# Altium PCB Yamper.PcbDoc
Units mm, origin at the board's own origin, x right, y up, seen from the top; angles counter-clockwise.
Board outline 35.96 x 25.42 mm, 2 copper layers (Top Layer, Bottom Layer); 27 components, 19 nets, 101 pads, 29 vias.
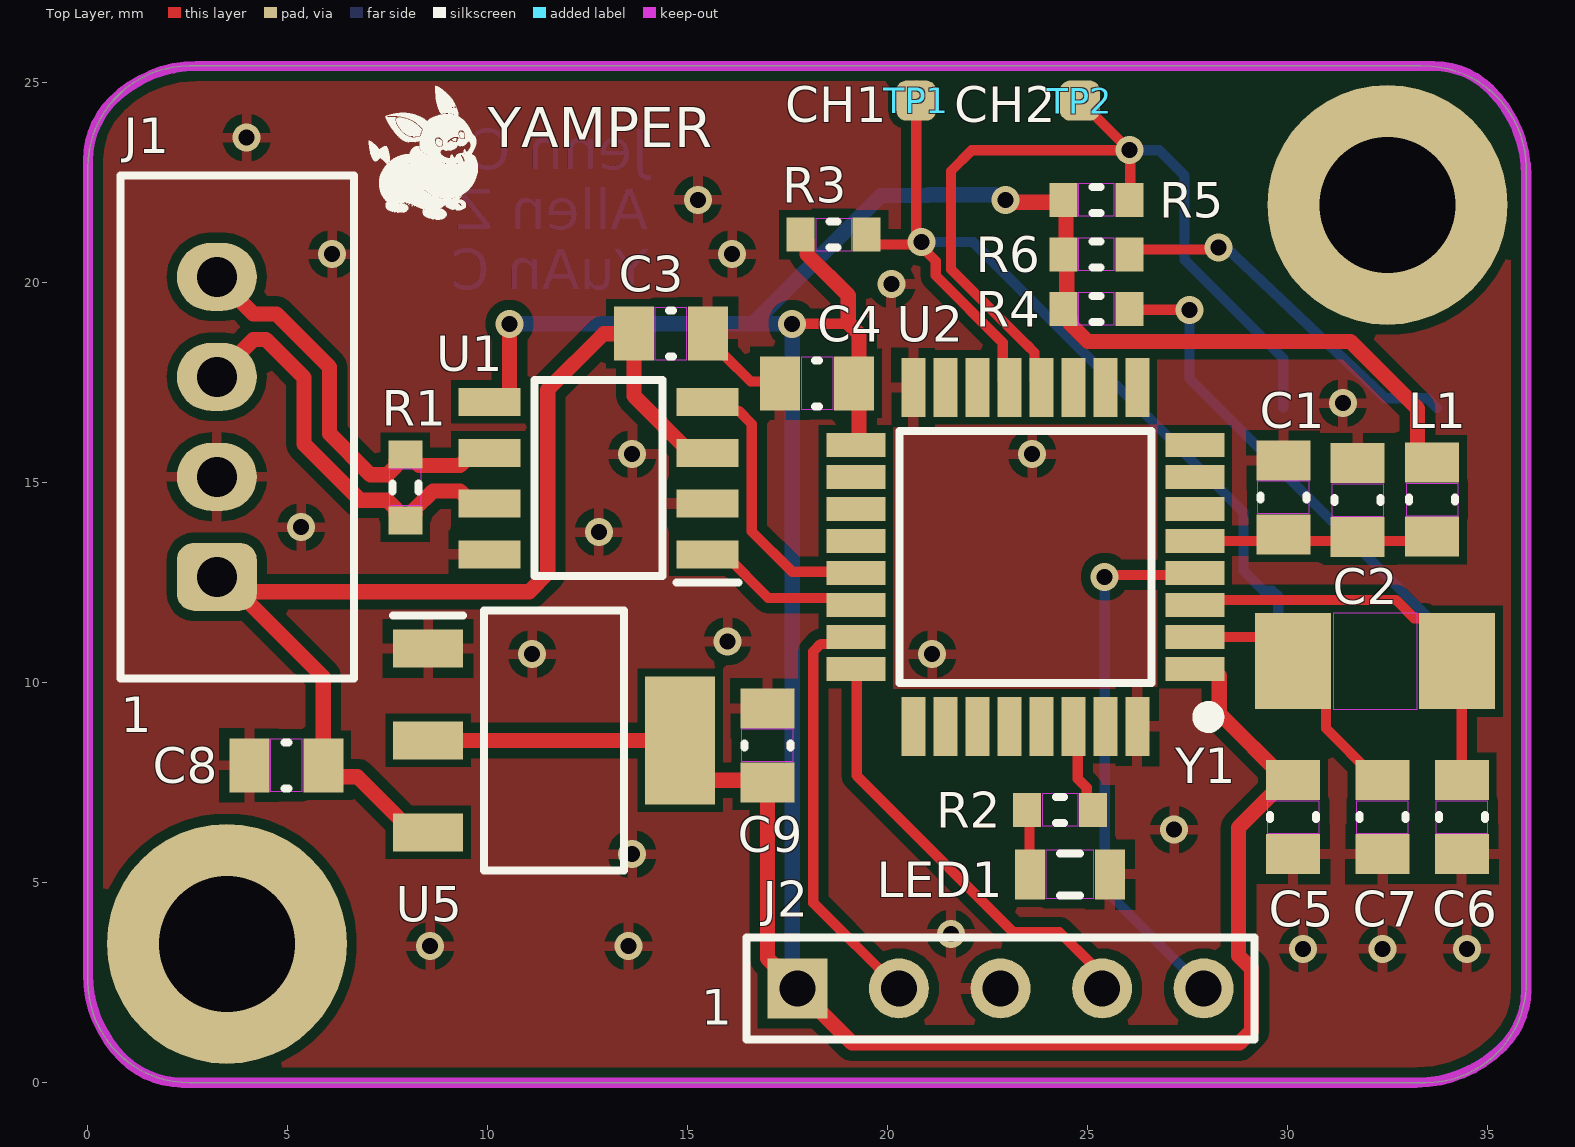
[diagram p0: Top Layer view]
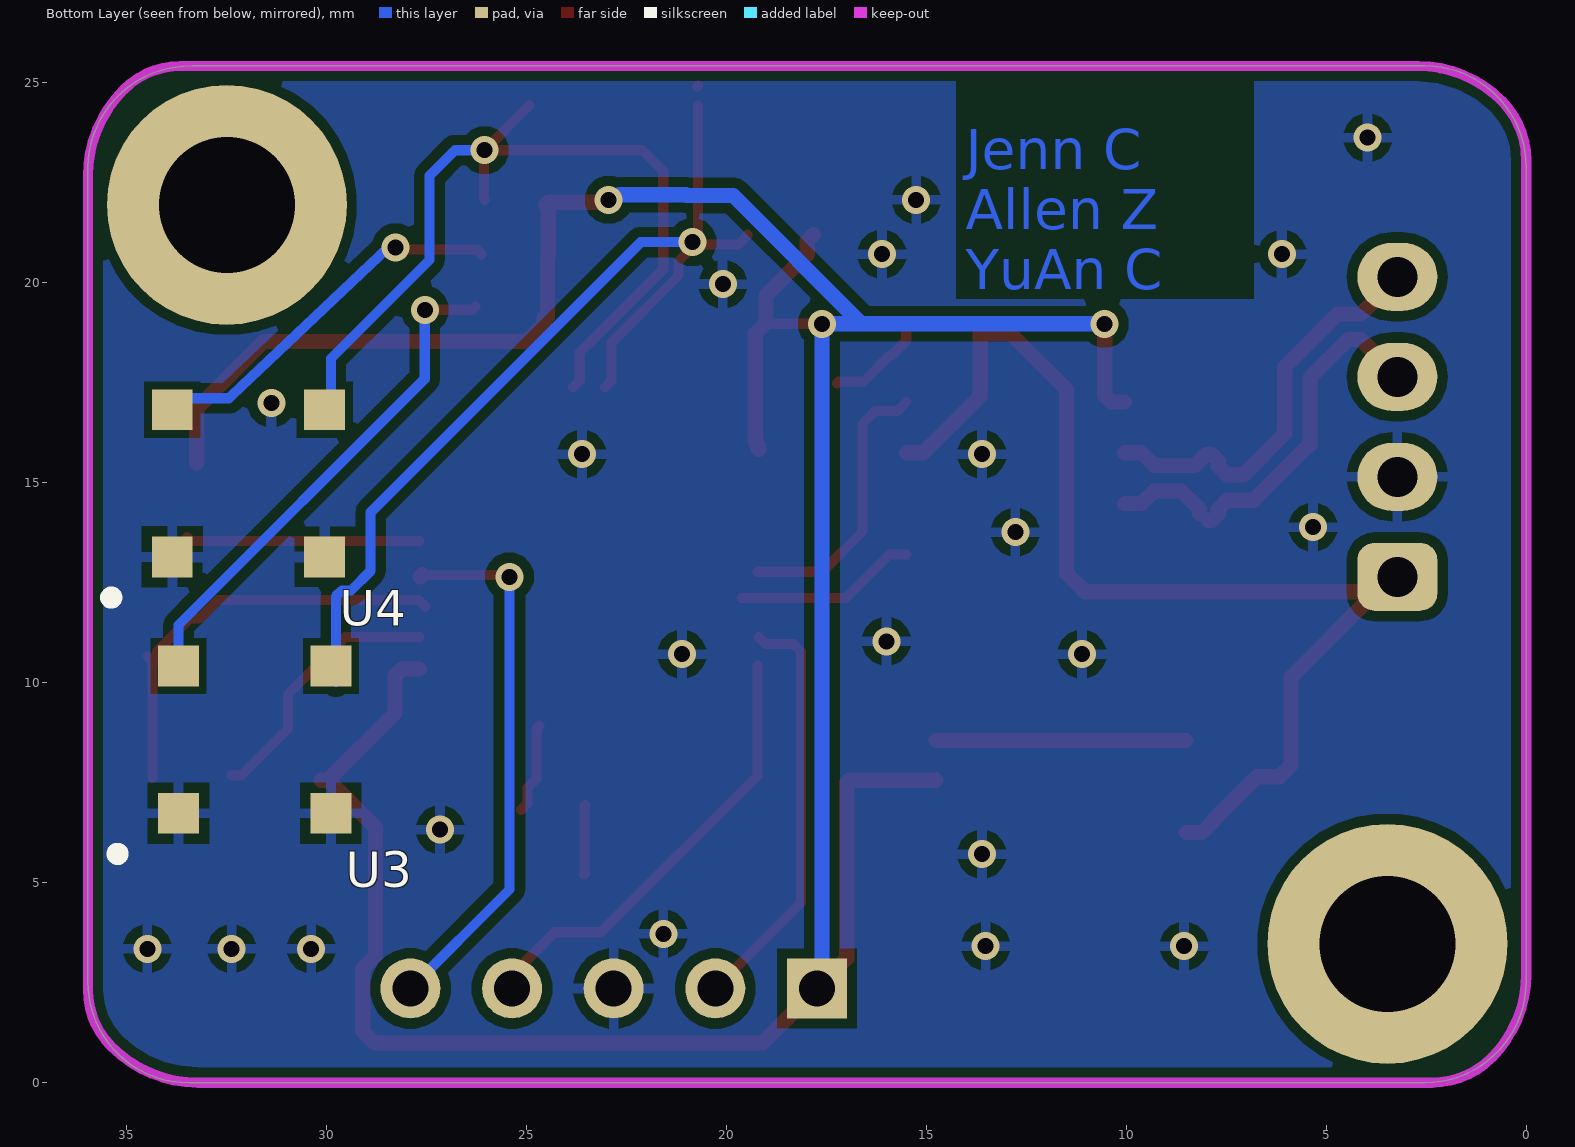
[diagram p1: Bottom Layer view, seen from below]
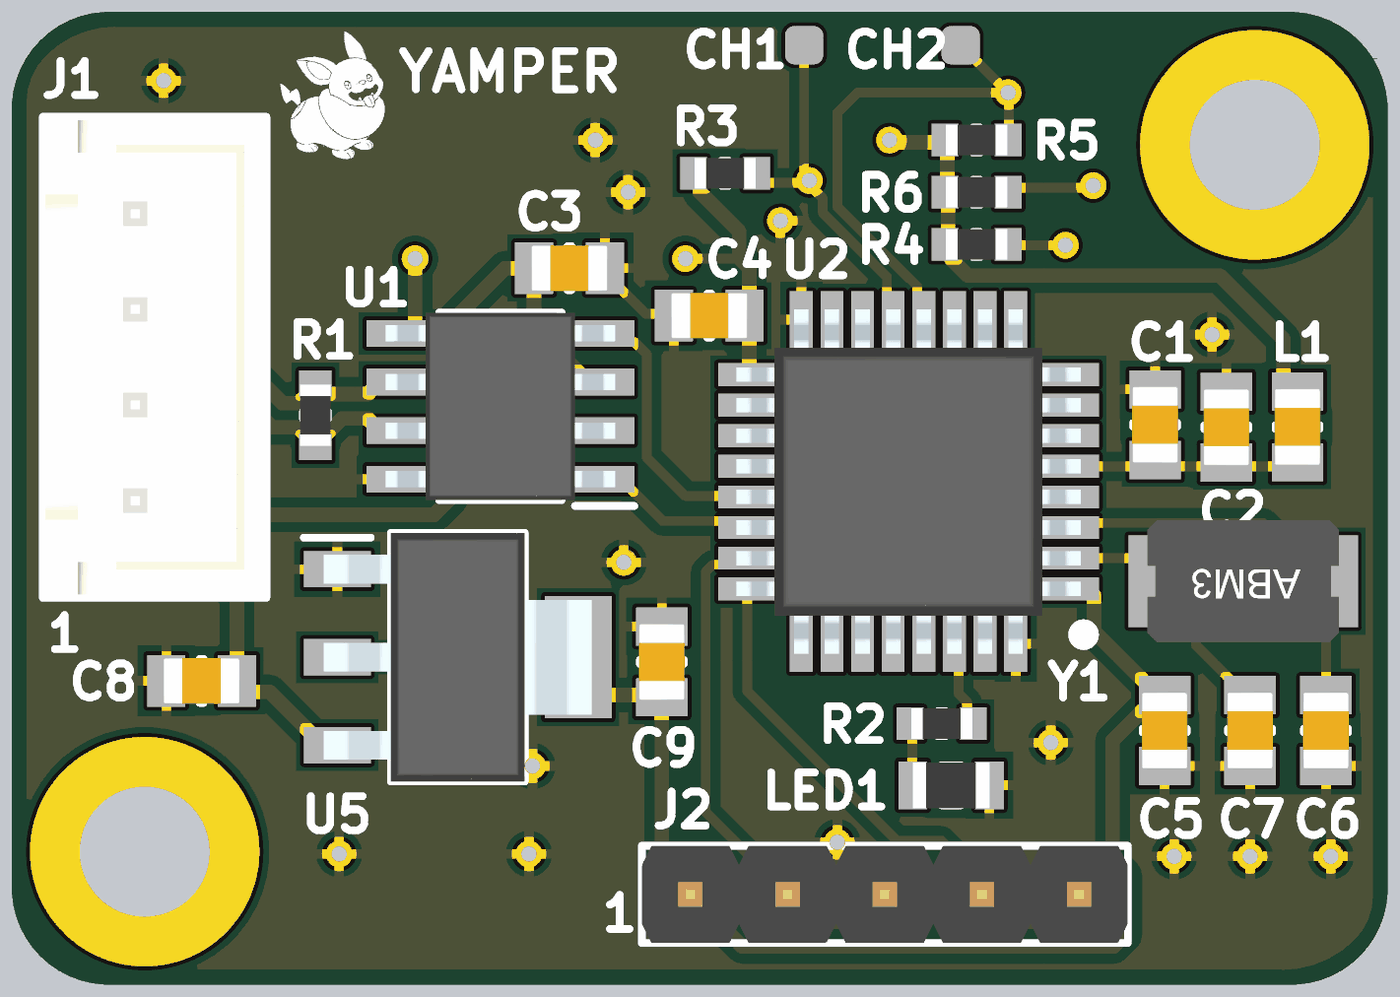
[diagram p2: 3D render of the assembled board from above, using the file's embedded part models]

## Layer stack, top to bottom
Top Solder: solder mask 0.0102, Solder Resist, Dk 3.5
Top Layer: signal copper 0.0356
Dielectric 1: dielectric 0.32, FR-4, Dk 4.8
Bottom Layer: signal copper 0.0356
Bottom Solder: solder mask 0.0102, Solder Resist, Dk 3.5

## Board outline
2.54,0 cw(c2.54,2.54) 0,2.54 0,22.88 cw(c2.54,22.88) 2.54,25.42 33.356,25.42 cw(c33.391,22.851) 35.96,22.88 35.96,2.54 cw(c33.449,2.512) 33.449,0

## Design rules (kind name [scope] priority, off if disabled: settings)
Clearance [All] p1: gap=0.254 ignorepadtopadclearanceinfootprint=FALSE except(0: Arc-Hole Track-Hole SMDPad-Hole THPad-Hole Via-Hole Fill-Hole Poly-Hole Region-Hole Text-Hole; 0.127: Arc-Arc Arc-Track Track-Track SMDPad-SMDPad; 0.2: Arc-SMDPad Track-SMDPad SMDPad-Fill SMDPad-Poly SMDPad-Region)
DiffPairsRouting [All] p1: maxlimit=0.254 minlimit=0.254 mostfreqgap=0.254 substack1={6880419E-5F7E-40DC-B808-49A93CB59D2A} toplayer_{6880419e-5f7e-40dc-b808-49a93cb59d2a}_minwidth=0.381 toplayer_{6880419e-5f7e-40dc-b808-49a93cb59d2a}_maxwidth=0.381 toplayer_{6880419e-5f7e-40dc-b808-49a93cb59d2a}_prefwidth=0.381 bottomlayer_{6880419e-5f7e-40dc-b808-49a93cb59d2a}_minwidth=0.381 bottomlayer_{6880419e-5f7e-40dc-b808-49a93cb59d2a}_maxwidth=0.381 bottomlayer_{6880419e-5f7e-40dc-b808-49a93cb59d2a}_prefwidth=0.381 toplayer_minwidth=0.381 toplayer_maxwidth=0.381 toplayer_prefwidth=0.381 bottomlayer_minwidth=0.381 bottomlayer_maxwidth=0.381 bottomlayer_prefwidth=0.381 maxuncoupledlength=12.7
PolygonConnect [All] p1: connectstyle=Relief reliefconductorwidth=0.254 reliefentries=4 polygonreliefangle="90 Angle" airgapwidth=0.254
RoutingVias [All] p1: holewidth=0.5 width=1 viastyle="Through Hole" minholewidth=0.2 minwidth=0.6 maxholewidth=0.711 maxwidth=1.27
SilkToSolderMaskClearance [IsPad] p1: minsilkscreentomaskgap=0.15 clearancetoexposedcopper=TRUE
SolderMaskExpansion [All] p1: expansion=0.102 istentingtop=FALSE
Width [All] p1: maxlimit=10 minlimit=0.254 preferedwidth=0.254 substack1={6880419E-5F7E-40DC-B808-49A93CB59D2A} toplayer_{6880419e-5f7e-40dc-b808-49a93cb59d2a}_maxwidth=0.381 toplayer_{6880419e-5f7e-40dc-b808-49a93cb59d2a}_prefwidth=0.381 bottomlayer_{6880419e-5f7e-40dc-b808-49a93cb59d2a}_maxwidth=0.381 bottomlayer_{6880419e-5f7e-40dc-b808-49a93cb59d2a}_prefwidth=0.381 minimp=50.000000 maximp=50.000000 favimp=50.000000
28 further rules are at their usual default settings.

## Classes and differential pairs
differential pair CAN: +CAN_P -CAN_N

## Components (designator, comment, footprint, x,y, rotation, side; value= is the part's Value field where it differs from the comment)
C1 "Capacitor - Nonpolarized" "0805 - Capacitor" 29.884,14.632 r90 top value=10nF
C2 "Capacitor - Nonpolarized" "0805 - Capacitor" 31.744,14.565 r90 top value=1uF
C3 "Capacitor - Nonpolarized" "0805 - Capacitor" 14.575,18.724 r180 top value=100nF
C4 "Capacitor - Nonpolarized" "0805 - Capacitor" 18.228,17.484 r180 top value=100nF
C5 "Capacitor - Nonpolarized" "0805 - Capacitor" 30.132,6.639 r90 top value=100nF
C6 "Capacitor - Nonpolarized" "0805 - Capacitor" 34.348,6.639 r90 top value=27pF
C7 "Capacitor - Nonpolarized" "0805 - Capacitor" 32.364,6.639 r90 top value=27pF
C8 "Capacitor - Nonpolarized" "0805 - Capacitor" 4.96,7.936 r180 top value=10uF
C9 "Capacitor - Nonpolarized" "0805 - Capacitor" 16.988,8.432 r270 top value=10uF
J1 "JST4PINXH" B4B-XH 3.224,12.648 r90 top
J2 "1x5 Header" HDR1X5 17.736,2.356 r0 top
L1 "Inductor" "0805 - Capacitor" 33.604,14.575 r90 top
LED1 "RED DEBUG LED" "0805 - Resistor" 24.552,5.208 r0 top
R1 "Resistor" "0603 - Resistor" 7.936,14.88 r270 top value=120
R2 "Resistor" "0603 - Resistor" 24.304,6.82 r180 top value=120
R3 "Resistor" "0603 - Resistor" 18.643,21.204 r180 top value=10k
R4 "Resistor" "0603 - Resistor" 25.215,19.344 r0 top value=80
R5 "Resistor" "0603 - Resistor" 25.215,22.072 r180 top value=10k
R6 "Resistor" "0603 - Resistor" 25.215,20.708 r0 top value=80
TP1 "Test Point" "Test Point" 20.708,24.552 r90 top
TP2 "Test Point" "Test Point" 24.8,24.552 r90 top
U1 "TJA1051T_3,118" TJA1051T/3,118 12.769,15.113 r180 top
U2 "STM32F042K4T6" QFP80P900X900X160-32N 23.436,13.144 r180 top
U3 "OPB733TR" OPB733TR 33.694,6.736 r180 bottom
U4 "OPB733TR" OPB733TR 33.852,13.144 r180 bottom
U5 "TLV1117-33IDCYR" TLV1117 11.656,8.556 r0 top
Y1 "Oscillator" "2-SMD NO LEAD CRSYSTAL" 32.182,10.54 r180 top value=16MHz

## Footprints (in the part's own frame and the unit in brackets; to place one, negate y for a bottom-side part, rotate by r counter-clockwise, add the part's x,y. Pads: shape width x height; smd on the part's side, far side on the other; paste and mask are expansions set on the pad)
"2-SMD NO LEAD CRSYSTAL" [mm]
  rect 1.9x2.4 smd: 1(-2.05,0) 2(2.05,0)
  Top Layer keep-out region: -1.05,1.2 -1.05,-1.2 1.05,-1.2 1.05,1.2
  body extent -2.5,-1.6 2.5,1.6, height 1.3
"0603 - Resistor" [mm] "0603 Chip Resistor - IPC Medium Density"
  rect 0.7x0.85 smd: 1(-0.825,0) 2(0.825,0)
  Top Layer keep-out region: -0.45,0.4 -0.45,-0.4 0.45,-0.4 0.45,0.4
  silkscreen extent -0.1,-0.33 0.1,0.33, body extent -0.8,-0.4 0.8,0.4, height 0.45
"0805 - Capacitor" [mm] "0805 Chip Capacitor - IPC Medium Density"
  rect 1x1.35 smd: 1(-0.925,0) 2(0.925,0)
  Top Layer keep-out region: -0.4,0.65 -0.4,-0.65 0.4,-0.65 0.4,0.65
  silkscreen extent -0.05,-0.58 0.05,0.58, body extent -1,-0.6 1,0.6, height 1.2
"0805 - Resistor" [mm] "0805 Chip Resistor - IPC Medium Density"
  rect 0.75x1.25 smd: 1(-1,0) 2(1,0)
  Top Layer keep-out region: -0.6,0.6 -0.6,-0.6 0.6,-0.6 0.6,0.6
  silkscreen extent -0.25,-0.53 0.25,0.53, body extent -1,-0.6 1,0.6, height 0.5
B4B-XH [mm] "JST 4-Pin"
  rrect50% 1.7x2 hole 1: 1(0,0)
  oval 1.7x2 hole 1: 2(2.5,0) 3(5,0) 4(7.5,0)
  silkscreen extent -2.54,-3.43 10.03,2.41, body extent -2.45,-3.4 9.95,2.35, height 7
HDR1X5 [mm] "Connector; Header; 5 Position"
  rect 1.5x1.5 hole 0.9: 1(0,0)
  round 1.5 hole 0.9: 2(2.54,0) 3(5.08,0) 4(7.62,0) 5(10.16,0)
  silkscreen extent -1.27,-1.27 11.43,1.27, body extent -1.27,-1.27 11.43,1.27, height 8.54
OPB733TR [mm] "Phototransistor"
  rect 1.02x1.02 smd: 1(0,0) 2(3.81,0) 3(3.81,3.68) 4(0,3.68)
  silkscreen extent -1.65,-1.14 -1.4,-0.89, body extent -1.9,-0.25 5.72,3.81, height 3.59
QFP80P900X900X160-32N [mm]
  rect 1.475x0.6 smd: 1(-4.238,2.8) 2(-4.238,2) 3(-4.238,1.2) 4(-4.238,0.4) 5(-4.238,-0.4) 6(-4.238,-1.2) 7(-4.238,-2) 8(-4.238,-2.8) 17(4.238,-2.8) 18(4.238,-2) 19(4.238,-1.2) 20(4.238,-0.4) 21(4.238,0.4) 22(4.238,1.2) 23(4.238,2) 24(4.238,2.8)
  rect 0.6x1.475 smd: 9(-2.8,-4.238) 10(-2,-4.238) 11(-1.2,-4.238) 12(-0.4,-4.238) 13(0.4,-4.238) 14(1.2,-4.238) 15(2,-4.238) 16(2.8,-4.238) 25(2.8,4.238) 26(2,4.238) 27(1.2,4.238) 28(0.4,4.238) 29(-0.4,4.238) 30(-1.2,4.238) 31(-2,4.238) 32(-2.8,4.238)
  silkscreen extent -4.77,-3.15 3.15,4.2, body extent -4.5,-4.5 4.5,4.5, height 1.6
"Test Point" [mm] "Test Point"
  rrect50% 1x1 smd: 1(0,0)
TJA1051T/3,118 [mm] "SOIC127P600X175-8N"
  rect 1.55x0.7 smd: 1(-2.725,1.905) 2(-2.725,0.635) 3(-2.725,-0.635) 4(-2.725,-1.905) 5(2.725,-1.905) 6(2.725,-0.635) 7(2.725,0.635) 8(2.725,1.905)
  silkscreen extent -3.5,-2.45 1.6,2.61, body extent -3,-2.45 3,2.45, height 1.75
TLV1117 [mm] "SOT230P700X180-4N"
  rect 1.75x0.95 smd: 1(-3.15,2.3) 2(-3.15,0) 3(-3.15,-2.3)
  rect 1.75x3.2 smd: 2(3.15,0)
  silkscreen extent -4.03,-3.25 1.75,3.25, body extent -3.5,-3.25 3.5,3.25, height 1.8

## Part data
C1 C2 C3 C4 C5 C6 C7 C8 C9: "Nonpolarized Capacitor"
J1: library part "1x4 Header", "1x4 Pin Header"
J2: "1x5 Pin Header"
LED1: library part LED, "Light Emitting Diode"
U1: "CAN Transceiver IC 4.5V-5.5V 250ns", Manufacturer=NXP, Manufacturer Part Number=TJA1051T/3,118, Supplier Part Number=568-8684-1-ND, ComponentLink1Description=Datasheet, ComponentLink1URL=http://www.nxp.com/docs/en/data-sheet/TJA1051.pdf, Datasheet=http://www.nxp.com/docs/en/data-sheet/TJA1051.pdf, Supplier=Digikey
U2: "Microcontroller", Manufacturer_Name=STMicroelectronics, Mouser Part Number=511-STM32F042K4T6, ComponentLink1Description=Datasheet, ComponentLink1URL=https://www.mouser.com/datasheet/2/389/stm32f042c4-956225.pdf, Height=1.6mm, Manufacturer_Part_Number=STM32F042K4T6, Mouser Price/Stock=https://www.mouser.co.uk/ProductDetail/STMicroelectronics/STM32F042K4T6?qs=ClYTdQWm4hDAfZj5dd9NhA%3D%3D
U3 U4: "Phototransistor"
U5: "Linear Voltage Regulator IC 3.3V 800MA SOT223-4", Manufacturer="Texas Instruments", Supplier Part Number=296-21112-1-ND, ComponentLink1Description=Datasheet, ComponentLink1URL=http://www.ti.com/lit/ds/symlink/tlv1117.pdf?HQS=TI-null-null-digikeymode-df-pf-null-wwe&ts=1590668900314, Manufacturer Part Number=TLV1117-33IDCYR, Supplier=Digikey
Y1: "Crystal Oscillator"

## Free pads (board coordinates)
  round 6 hole 3.4: MOUNT1(32.488,21.948) MOUNT2(3.472,3.472)

## Via types
v1: diameter 0.7, hole 0.4, Top Layer to Bottom Layer, 29 vias

## Nets (pads, with @x,y where several pads share a name; then routed paths per layer and width w, separated by ;. In a path a pad name is that pad's centre, name@x,y a point inside that pad or via, vN(x,y) a via of type N, cw(c..) or ccw(c..) an arc to the next point about the centre after c; other vN are vias at no path point)
+3.3V: C4.1 C5.2 C9.2 J2.1 L1.2 R3.2 R4.1 R5.2 R6.1 U1.5 U2.1 U2.17 U5.2 | length 93
  Top Layer w0.254: v1(17.608,18.972) 18.848,18.972
  Top Layer w0.381: U5.2@8.506,8.556 U5.2@14.756,8.556 ; U1.5 10.38,17.018 10.54,17.178 v1(10.54,18.972) ; U5.2@14.756,7.564 16.931,7.564 C9.2 16.988,3.104 17.608,2.484 J2.1@17.608,2.356 ; J2.1 19.1,0.992 28.793,0.992 29.091,1.29 29.091,2.851 28.768,3.173 28.768,6.076 28.768,6.375 C5.2@29.957,7.564 ; R3.2 17.978,21.044 17.978,20.71 19.01,19.678 19.01,18.991 19.277,18.724 19.277,16.023 U2.17 ; U2.17@19.182,15.834 U2.17@19.22,15.872 ; v1(22.94,22.072) 23.001,22.011 24.451,22.011 R5.2@24.514,21.948 ; R5.2@24.449,21.803 24.449,20.687 R6.1@24.471,20.665 ; R6.1@24.471,20.541 24.471,19.145 24.514,19.145 24.55,19.109 24.55,18.974 24.996,18.528 31.567,18.528 33.238,16.858 L1.2@33.238,15.5 ; U2.1 28.112,10.344 28.285,10.171 28.285,9.236 C5.2@29.957,7.564 ; C5.2 C5.2@29.957,7.564
  Bottom Layer w0.381: v1(10.54,18.972) 16.616,18.972 ; J2.1 17.608,2.484 v1(17.608,18.972) 16.616,18.972 ; v1@22.679,22.196 21.008,22.196 21.002,22.191 21.003,22.183 19.827,22.183 16.616,18.972
+5V: C3.2 C8.1 J1.1 U1.3 U5.3 | length 27.8
  Top Layer w0.381: U5.3 8.106,6.256 7.822,6.54 7.822,6.563 6.733,7.651 6.17,7.651 C8.1 5.885,10.137 3.746,12.276 11.036,12.276 11.497,12.737 11.497,17.325 12.896,18.724 C3.2 13.65,17.167 15.069,15.748 U1.3
CAN_N: J1.4 R1.1 U1.6 | length 10.4
  Top Layer w0.254: U1.6@10.022,15.726 U1.6
  Top Layer w0.381: J1.4 3.224,20.128 4.136,19.216 4.715,19.216 6.038,17.892 6.038,16.226 7.066,15.198 7.478,15.198 7.701,15.421 7.701,15.545 7.861,15.705 R1.1 8.011,15.705 8.285,15.43 9.302,15.43 9.619,15.748 U1.6
CAN_P: J1.3 R1.2 U1.7 | length 10.4
  Top Layer w0.381: J1.3 3.224,17.668 4.136,18.581 4.452,18.581 5.403,17.629 5.403,15.963 6.803,14.563 7.478,14.563 7.701,14.339 7.701,14.215 7.861,14.055 R1.2 ; R1.2@8.17,14.215 8.17,14.339 8.627,14.795 9.302,14.795 9.619,14.478 U1.7
CANRX: U1.4 U2.21 | length 7.1
  Top Layer w0.254: U1.4 15.717,16.795 16.27,16.795 16.596,16.469 16.596,13.993 ; 16.595,13.992 16.595,13.781 17.605,12.772 U2.21@19.22,12.772
CANTX: U1.1 U2.22 | length 4.6
  Top Layer w0.254: U1.1 15.919,13.208 17.01,12.117 U2.22@19.618,12.117
GND: C1.2 C2.2 C3.1 C4.2 C5.1 C6.1 C7.1 C8.2 C9.1 J1.2 J2.3 LED1.2 U1.2 U1.8 U2.16 U2.32 U3.1 U3.2 U4.1 U4.2 U5.1 | length 2.4
  Top Layer w0.254: C3.1 15.5,18.549 15.873,18.176 15.923,18.176 16.571,17.529 17.191,17.529 C4.2@17.236,17.484
  other v1: 30.38,3.348 32.364,3.348 34.472,3.348 8.556,3.413 13.516,3.413 21.576,3.72 13.608,5.712 27.156,6.324 11.108,10.712 21.108,10.712 15.996,11.036 12.772,13.764 5.332,13.888 13.608,15.712 23.608,15.712 31.372,16.988 20.088,19.964 6.108,20.712 16.108,20.712 15.252,22.072 3.968,23.625
NetC1_1: C1.1 C2.1 L1.1 U2.5 | length 5.8
  Top Layer w0.254: U2.5 29.884,13.544 31.62,13.544 33.384,13.544 L1.1@33.48,13.64
NetLED1_1: LED1.1 R2.2 | length 1.7
  Top Layer w0.254: R2.2@23.522,6.944 23.537,6.929 23.537,5.223 LED1.1
NetR2_1: R2.1 U2.30 | length 2.3
  Top Layer w0.254: U2.30@24.676,8.928 24.746,8.859 24.746,7.597 24.969,7.373 24.969,6.98 R2.1
NetR4_2: R4.2 U3.4 | length 12.8
  Top Layer w0.254: R4.2@26.269,19.398 26.344,19.323 v1(27.538,19.323)
  Bottom Layer w0.254: v1(27.538,19.323) 27.538,17.598 33.694,11.442 U3.4
NetR6_2: R6.2 U4.4 | length 9.3
  Top Layer w0.254: R6.2@26.121,20.708 26.239,20.826 28.21,20.826 v1(28.265,20.881)
  Bottom Layer w0.254: v1(28.265,20.881) 28.339,20.883 28.342,20.883 28.447,20.883 32.359,17.181 32.433,17.112 33.48,17.112 U4.4@33.728,16.864
NRESET: J2.5 U2.4 | length 13.6
  Top Layer w0.254: v1@25.468,12.696 U2.4@27.604,12.696
  Top Layer w0.381: v1(25.42,12.648) v1@25.468,12.696 ; U2.4@27.604,12.696 U2.4@27.652,12.648
  Bottom Layer w0.254: v1(25.42,12.648) 25.42,4.832 27.915,2.337 J2.5@27.919,2.337
OSCIN: C7.2 U2.2 Y1.2 | length 6.6
  Top Layer w0.254: U2.2 29.528,11.144 Y1.2 30.955,9.717 30.955,8.855 32.122,7.688 C7.2@32.364,7.688
OSCOUT: C6.2 U2.3 Y1.1 | length 10.6
  Top Layer w0.254: U2.3@27.528,11.904 27.691,12.067 32.705,12.067 33.159,11.613 33.409,11.613 34.232,10.79 Y1.1 ; C6.2@34.348,7.621 34.348,10.54 Y1.1@34.472,10.664
PT-CH1: R3.1 TP1.1 U2.13 U3.3 | length 25
  Top Layer w0.254: R3.1 19.468,21.179 19.691,20.956 20.776,20.956 20.776,21.085 v1@20.776,21.26 ; v1@20.708,21.222 TP1.1@20.708,24.428 ; TP1.1@20.708,24.924 TP1.1@20.729,24.903 ; v1@20.845,20.894 21.195,20.544 21.195,20.178 22.873,18.501 22.873,17.545 U2.13
  Bottom Layer w0.254: v1(20.845,21.014) 22.138,21.014 28.892,14.26 28.892,12.797 29.382,12.307 29.611,12.307 29.76,12.158 U3.3@29.76,10.019
PT-CH2: R5.1 TP2.1 U2.12 U4.3 | length 22.3
  Top Layer w0.254: U2.12 23.663,17.555 23.663,18.255 23.471,18.447 23.465,18.447 21.576,20.336 21.576,22.791 22.097,23.312 v1(26.04,23.312) ; TP2.1@24.924,24.428 v1(26.04,23.312) ; R5.1 26.059,22.091 26.059,23.293 v1(26.04,23.312)
  Bottom Layer w0.254: v1(26.04,23.312) 26.784,23.312 27.419,22.677 27.419,20.569 29.884,18.104 U4.3@29.884,16.88
SWCLK: J2.4 U2.24 | length 11.3
  Top Layer w0.254: U2.24@19.22,10.433 19.22,7.676 23.135,3.762 24.289,3.762 25.118,2.933 25.118,2.594 J2.4
SWDIO: J2.2 U2.23 | length 10.5
  Top Layer w0.254: U2.23 19.025,10.971 18.325,10.971 18.133,10.779 18.133,4.499 J2.2
pads on no net: U2.6 U2.7 U2.8 U2.9 U2.10 U2.11 U2.14 U2.15 U2.18 U2.19 U2.20 U2.25 U2.26 U2.27 U2.28 U2.29 U2.31

## Polygon pours and split planes (outlines as drawn)
GND on Bottom Layer "GND_L02_P001" (solid, pour order 1): 2.54,0 cw(c2.54,2.54) 0,2.54 0,22.88 cw(c2.54,22.88) 2.54,25.42 33.42,25.42 cw(c33.42,22.88) 35.96,22.88 35.96,2.54 cw(c33.42,2.54) 33.42,0
GND on Top Layer "GND_L01_P000" (solid, remove dead copper, pour order 0): 0,22.88 cw(c2.54,22.88) 2.54,25.42 33.42,25.42 cw(c33.42,22.88) 35.96,22.88 35.96,2.54 cw(c33.42,2.54) 33.42,0 2.54,0 cw(c2.54,2.54) 0,2.54

## Keep-outs
Keep-Out Layer:
  lines w0.254: 0,2.716 ccw(c2.964,2.716) 0.868,0.62 ccw(c2.365,2.117) 2.365,0 33.202,0 ccw(c33.202,3.066) 35.37,0.898 ccw(c33.946,2.322) 35.96,2.322 35.96,22.662 ccw(c32.894,22.662) 35.062,24.83 ccw(c33.638,23.406) 33.638,25.42 2.716,25.42 ccw(c2.716,22.456) 0.62,24.552 ccw(c2.117,23.055) 0,23.055 0,18.352 0,2.716

## Other copper
Bottom Layer:
  text "Jenn C / Allen Z / YuAn C" at 14.012,19.84 h1

## Silkscreen, mask and mechanical layers (free items; w line width, h text height)
Top Overlay:
  drawing of 47 lines, arcs and shapes, not listed
  text "CH1" at 17.439,24.011 h0.89
  text "CH2" at 21.655,24.011 h0.89
  text "YAMPER" at 9.999,23.391 h1
  text "1" at 0.823,8.759 h0.89
  text "1" at 15.331,1.443 h0.89
Bottom Solder:
  text "Jenn C / Allen Z / YuAn C" at 14.012,19.84 h1